# Altium PCB hades_flight_controller_pcb.PcbDoc (part 2 of 2)
Units mm, origin at the board's own origin, x right, y up, seen from the top; angles counter-clockwise.
Board outline 60 x 80 mm, 2 copper layers (Top Layer, Bottom Layer), stack 1.67 mm thick; 73 components, 57 nets, 348 pads, 115 vias.
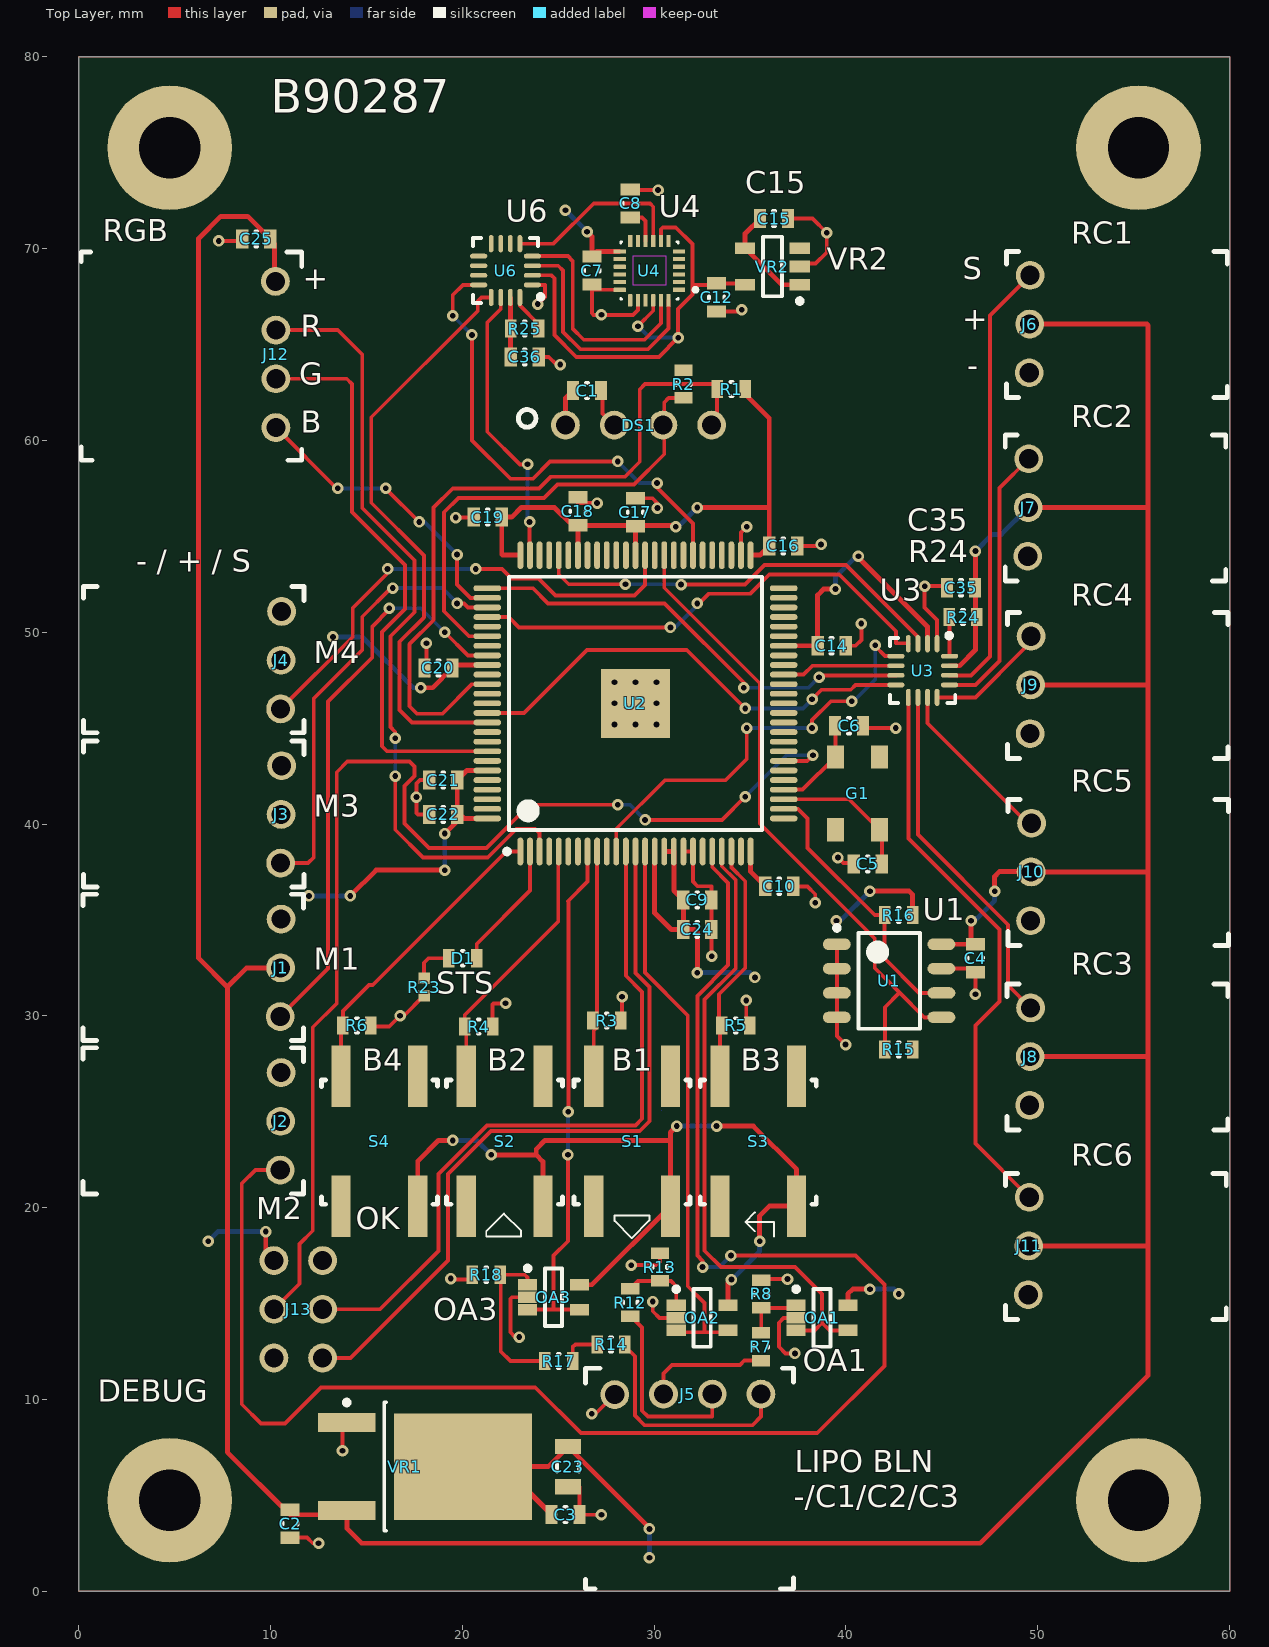
[diagram p0: Top Layer view]

## Part data (continued)
U4: "IMU ACCEL/GYRO/COMPI2C/SPI 24QFN", Case/Package=QFN, Manufacturer="TDK InvenSense", Max Operating Temperature=85°C, Min Operating Temperature=-40°C, Supplier Part Number 1=2911498, ComponentLink1Description=https://www.invensense.com/wp-content/uploads/2016/06/App-Note-eMD-20x48-User-Guide.pdf?src-supplier=Avnet, ComponentLink1URL=https://www.invensense.com/wp-content/uploads/2016/06/App-Note-eMD-20x48-User-Guide.pdf?src-supplier=Avnet, ComponentLink2Description=https://www.invensense.com/wp-content/uploads/2016/06/App-Note-eMD-20x48-User-Guide.pdf?src-supplier=Avnet+Europe, ComponentLink2URL=https://www.invensense.com/wp-content/uploads/2016/06/App-Note-eMD-20x48-User-Guide.pdf?src-supplier=Avnet+Europe, ComponentLink3Description=https://www.invensense.com/wp-content/uploads/2016/06/App-Note-eMD-20x48-User-Guide.pdf?src-supplier=Digi-Key, ComponentLink3URL=https://www.invensense.com/wp-content/uploads/2016/06/App-Note-eMD-20x48-User-Guide.pdf?src-supplier=Digi-Key, ComponentLink4Description=http://www.farnell.com/datasheets/2632662.pdf?src-supplier=Farnell, ComponentLink4URL=http://www.farnell.com/datasheets/2632662.pdf?src-supplier=Farnell, ComponentLink5Description=http://www.farnell.com/datasheets/2632662.pdf?src-supplier=Element14, ComponentLink5URL=http://www.farnell.com/datasheets/2632662.pdf?src-supplier=Element14, ComponentLink6Description=http://www.farnell.com/datasheets/2632662.pdf?src-supplier=Newark, ComponentLink6URL=http://www.farnell.com/datasheets/2632662.pdf?src-supplier=Newark, ComponentLink7Description=https://www.invensense.com/wp-content/uploads/2016/06/App-Note-eMD-20x48-User-Guide.pdf?src-supplier=Component+Distributors+Inc., ComponentLink7URL=https://www.invensense.com/wp-content/uploads/2016/06/App-Note-eMD-20x48-User-Guide.pdf?src-supplier=Component+Distributors+Inc., Manufacturer Part Number=ICM-20948, Mount="Surface Mount", Output Type=SPI,I2C, Packaging="Tape and Reel", Pricing 1="1=6.72, 10=4.51, 25=4.42, 50=4.33 (EUR)", RoHS Compliant=Yes, Sensor Type=Accelerometer,Gyroscope,Magnetometer, Stock 1=0, Supplier 1=Farnell
VR1: "Single-Output LDO, 800mA, Fixed (3.3), Internal Current Limit, Thermal Overload Protection 3-TO-252 0 to 125", Case/Package=TO-252-3, Dropout Voltage=1.2V, Input Bias Current=5mA, Manufacturer="Texas Instruments", Max Input Voltage=15V, Max Operating Temperature=125°C, Max Output Current=800mA, Min Input Voltage=4.7V, Min Operating Temperature=-40°C, Nominal Output Voltage=3.3V, Package Quantity=1, Quiescent Current=10mA, Supplier Part Number 1=2463937RL, ComponentLink1Description=http://www.farnell.com/datasheets/1994335.pdf?src-supplier=Element14, ComponentLink1URL=http://www.farnell.com/datasheets/1994335.pdf?src-supplier=Element14, ComponentLink2Description=http://www.ti.com/lit/ds/symlink/tlv1117.pdf?src-supplier=Digi-Key, ComponentLink2URL=http://www.ti.com/lit/ds/symlink/tlv1117.pdf?src-supplier=Digi-Key, ComponentLink3Description=http://www.ti.com/general/docs/suppproductinfo.tsp?distId=10&amp;gotoUrl=http%3A%2F%2Fwww.ti.com%2Flit%2Fgpn%2Ftlv1117&src-supplier=Digi-Key, ComponentLink3URL=http://www.ti.com/general/docs/suppproductinfo.tsp?distId=10&amp;gotoUrl=http%3A%2F%2Fwww.ti.com%2Flit%2Fgpn%2Ftlv1117&src-supplier=Digi-Key, ComponentLink4Description=http://focus.ti.com/lit/ds/symlink/tlv1117-15.pdf?src-supplier=Avnet+Europe, ComponentLink4URL=http://focus.ti.com/lit/ds/symlink/tlv1117-15.pdf?src-supplier=Avnet+Europe, Lead Free="Lead Free", Manufacturer Part Number=TLV1117-33CKVURG3, Min Current Limit=800mA, Mount="Surface Mount", Number of Outputs=1, Number of Pins=3, Number of Regulators=1, Output Current=800mA, Output Type=Fixed, Output Voltage=3.3V, Packaging="Tape and Reel", Polarity=Positive, Radiation Hardening=No, REACH SVHC="No SVHC", RoHS Compliant=Yes, Series=-, Stock 1=0, Supplier 1=Farnell
VR2: "MCP1804T-1802I/OT; LDOVoltage Regulator; 150mA; 1.8V +/-2%; 2 to 28Vin; 5-Pin SOT-23", Case/Package=SOT-23, Dropout Voltage=2.2V, Manufacturer=Microchip, Max Input Voltage=28V, Max Operating Temperature=85°C, Max Output Current=150mA, Max Power Dissipation=250mW, Min Input Voltage=2V, Min Operating Temperature=-40°C, Min Output Voltage=1.8V, Quiescent Current=105uA, Supplier Part Number 1=1825003, Accuracy=2%, ComponentLink1Description=http://www.microchip.com/mymicrochip/filehandler.aspx?ddocname=en544680&src-supplier=Future+Electronics, ComponentLink1URL=http://www.microchip.com/mymicrochip/filehandler.aspx?ddocname=en544680&src-supplier=Future+Electronics, ComponentLink2Description=http://www.microchip.com/mymicrochip/filehandler.aspx?ddocname=en533805&src-supplier=Digi-Key, ComponentLink2URL=http://www.microchip.com/mymicrochip/filehandler.aspx?ddocname=en533805&src-supplier=Digi-Key, Height=1.3mm, Lead Free="Lead Free", Length=3.1mm, Manufacturer Part Number=MCP1804T-1802I/OT, Mount="Surface Mount", Nominal Output Voltage=1.8V, Number of Outputs=1, Number of Pins=5, Output Current=150mA, Output Type=Fixed, Output Voltage=1.8V, Packaging="Tape and Reel", Polarity=Positive, Pricing 1="1=1.04, 25=0.795, 100=0.722 (EUR)", REACH SVHC="No SVHC", RoHS Compliant=Yes, Stock 1=595, Supplier 1=Farnell, Width=1.8mm

## Free pads (board coordinates)
  round 6.5 hole 3.2: 5(55.25,75.25) 6(4.75,75.25) 7(55.25,4.75) 8(4.75,4.75)

## Via types
v1: diameter 0.6/0.6 (per signal layer), hole 0.3, Top Layer to Bottom Layer, tented both sides, 107 vias
v2: diameter 0.6/0.6 (per signal layer), hole 0.3, Top Layer to Bottom Layer, 8 vias

## Nets (pads, with @x,y where several pads share a name; then routed paths per layer and width w, separated by ;. In a path a pad name is that pad's centre, name@x,y a point inside that pad or via, vN(x,y) a via of type N, cw(c..) or ccw(c..) an arc to the next point about the centre after c; other vN are vias at no path point)
"+1.8 V": C12.1 U4.8 U4.22 U6.2 VR2.5 | length 26.5
  Top Layer w0.2: U6.2 24.645,68.605 24.795,68.455 24.795,65.495 25.935,64.355 30.25,64.355 v1(31.25,65.355) 31.25,66.855 32,67.605 32,68.105 ; v1(29.15,65.955) 29.95,66.755 U4.22 ; U4.8 30.35,71.005 30.45,71.105 31.125,71.105 32,70.23 32,68.105 ; C12.1 34.67,68.185 VR2.5 ; C12.1@33.52,68.025 33.44,68.105 32,68.105
  Bottom Layer w0.2: v1(29.15,65.955) 29.75,65.355 v1(31.25,65.355)
"+3.3 V": C1.1 C3.1 C7.1 C9.1 C10.1 C14.1 C15.1 C16.1 C17.1 C18.1 C19.1 C20.1 C21.1 C22.1 C23.1 C24.1 C36.1 DS1.1 J13.4 OA1.5 OA2.5 OA3.5 R1.1 R2.1 R15.1 R16.1 R25.1 S1.1 S2.1 S3.1 S4.1 U2.15 U2.16 U2.17 U2.25 U2.44 U2.51 U2.63 U2.69 U2.75 U2.84 U2.95 U2.100 U3.2 U4.13 U6.15 VR1.2 VR2.1 VR2.4 | length 181.7
  Top Layer w0.254: v1(9.75,18.75) 9.75,17.662 J13.4 ; v1(14.16,36.25) 15.505,37.595 v1(19.08,37.595) ; S4.1 17.675,22.425 18.75,23.5 v1(19.5,23.5) ; v1(17.83,47.105) 18.445,47.105 C20.1 19.63,48.29 U2.84 ; v1(19.08,39.5) 19.73,40.15 C22.1 ; C21.1@19.73,42.52 C21.1 ; VR1.2 VR1.2@22.145,6.5 ; U2.100 20.085,40.29 19.875,40.5 C22.1 ; U2.95 20.23,42.79 C21.1 ; v1(21.5,22.75) 23.85,22.75 ; U6.15 22.5,64.375 C36.1 ; U2.75 22.095,54.015 22.055,54.055 C19.1 22.575,56 23.075,56.5 24.795,56.5 25.725,55.57 C18.1 ; S2.1 24.2,22.4 23.85,22.75 ; C3.1 VR1.2@22.145,6.5 ; DS1.1 25.375,62.205 C1.1 ; C23.1 C23.1@25.512,7.538 ; C23.1@25.525,7.55 C23.1@25.512,7.538 ; U2.69 C18.1 ; OA3.5 26.755,15.98 S1.1 30.85,23.5 ; v1(26.5,70.875) 26.75,70.625 C7.1 27.015,69.85 U4.13 ; U2.63 C17.1 ; v1(29.75,3.25) 29.75,3.3 C23.1@25.512,7.538 ; U2.15 30.025,35.361 30.886,34.5 C24.1 ; U2.16 U2.17 31.025,36.535 C9.1 C24.1 ; v1(31.125,55.5) 31.055,55.57 C18.1 ; v1(31.18,24.25) 30.85,23.92 30.85,23.5 ; v1(32.25,32.25) 32.25,34.335 32.085,34.5 C24.1 ; v1(32.25,56.5) 36,56.5 ; v1(33.25,24.25) 35.175,24.25 37.425,22 S3.1 36,20.075 35.5,19.575 v1(35.5,18.25) ; OA2.5 33.85,16.075 v1(34.025,16.25) ; R1.1 34.75,62.41 36,61.16 36,56.5 ; U2.25 35.025,37.515 C10.1 ; U2.51 35.515,54.015 C16.1 36,56.5 ; C15.1 34.74,70.785 VR2.4 36.64,68.115 VR2.1 ; U2.44 C14.1 38.52,51.935 38.835,52.25 v1(39.45,52.25) ; OA1.5 40.1,15.5 40.35,15.75 v1(41.25,15.75) ; v1(40.65,53.96) 40.65,53.89 44.25,50.29 U3.2 ; v1(41.25,36.5) 43.29,36.5 43.475,36.315 R16.1 ; C22.1 C21.1 ; VR1.2@22.145,6.5 24.475,6.5 C23.1@25.512,7.538 ; 23.85,22.75 23.85,23.05 24.3,23.5 30.85,23.5
  Bottom Layer w0.254: v1(6.75,18.25) 7.25,18.75 v1(9.75,18.75) ; v1(12,36.25) v1(14.16,36.25) ; v1(13.25,49.75) 14.79,49.75 17.435,47.105 v1(17.83,47.105) ; v1(19.08,37.595) v1(19.08,39.5) ; v1(19.5,23.5) 20.75,23.5 v1(21.5,22.75) ; v1(25.375,72) v1(26.5,70.875) ; v1(29.75,1.75) v1(29.75,3.25) ; v1(31.125,55.5) 31.25,55.5 v1(32.25,56.5) ; v1(31.18,24.25) v1(33.25,24.25) ; v1(32.25,32.25) 35,32.25 v1(35.25,32) ; v1(34.025,16.25) 34.04,16.25 35.5,17.71 v1(35.5,18.25) ; v1(39.45,52.25) 39.45,52.865 40.545,53.96 v1(40.65,53.96) ; v1(39.5,34.96) 39.71,34.96 v1(41.25,36.5) ; v1(41.25,15.75) 42.5,15.75 v1(42.75,15.5)
"+5 V": C2.1 C4.1 C25.1 C35.1 J1.2 J6.2 J7.2 J8.2 J9.2 J10.2 J11.2 J12.1 R24.1 U1.8 U3.15 VR1.3 | length 238.9
  Top Layer w0.254: J12.1 10.2,68.342 10.2,70.28 C25.1 8.805,71.675 7.4,71.675 6.25,70.525 6.25,33 7.75,31.5 ; J1.2 8.75,32.5 7.75,31.5 ; U1.8 C4.1 46.52,33.96 v1(46.52,34.96) ; U3.15 45.92,48.25 46.75,49.08 v1(46.75,54.229) ; v1(47.75,36.5) 47.75,37.265 48,37.515 49.635,37.515 J10.2 55.75,37.5 ; J7.2 55.75,56.5 ; J11.2 55.75,18 ; J6.2@49.525,65.54 J6.2@49.565,65.5 ; J6.2 55.685,66.065 55.75,66 55.75,56.5 ; J8.2 55.625,27.875 55.75,28 ; J9.2 55.725,47.25 55.75,47.225 ; 7.75,31.5 7.75,7.25 11.015,3.985 13.75,3.985 VR1.3 13.975,3.275 14.75,2.5 47,2.5 55.75,11.25 55.75,18 ; 55.75,18 55.75,28 ; 55.75,28 55.75,37.5 ; 55.75,37.5 55.75,47.225 ; 55.75,47.225 55.75,56.5
  Bottom Layer w0.254: v1(46.52,34.96) 46.71,34.96 47.75,36 v1(47.75,36.5) ; v1(46.75,54.229) 47.621,55.1 48.1,55.1 J7.2
GND: C1.2 C2.2 C3.2 C4.2 C5.1 C6.1 C7.2 C8.2 C9.2 C10.2 C12.2 C14.2 C15.2 C16.2 C17.2 C18.2 C19.2 C20.2 C21.2 C22.2 C23.2 C24.2 C25.2 C35.2 C36.2 DS1.2 J1.1 J2.1 J3.1 J4.1 J5.1 J6.1 J7.1 J8.1 J9.1 J10.1 J11.1 J13.1 OA1.2 OA2.2 OA3.2 pad.5 pad.6 pad.7 pad.8 R3.2 R4.2 R5.2 R6.2 R8.2 R13.2 R18.2 R23.2 U1.1 U1.2 U1.3 U1.4 U1.7 U2.18 U2.19 U2.52 U3.1 U4.18 U4.20 U6.1 VR1.1 VR2.2 | length 87.2
  Top Layer w0.2: v1(7.3,70.395) 8.415,70.395 C25.2 ; J4.1 J4.1@10.58,51.08 ; C2.2 11.905,2.795 12.2,2.5 v1(12.5,2.5) ; v1(13.75,7.325) 13.75,8.565 VR1.1 ; R6.2@15.095,29.25 15.285,29.44 16.19,29.44 v1(16.75,30) 16.95,30 R23.2 ; v1(18.125,49.425) 18.125,47.875 C20.2@18.25,47.75 ; C22.2 17.674,40.5 17.605,40.569 v1(17.605,41.405) 17.605,42.105 17.79,42.29 C21.2 ; v1(19.4,16.3) 19.35,16.25 20.525,16.25 R18.2 ; v1(19.655,55.978) C19.2@20.845,55.978 ; R4.2 21.575,30.595 21.63,30.65 v1(22.25,30.65) ; v1(22.96,13.25) 22.75,13.25 22.5,13.5 22.5,15.25 22.58,15.33 OA3.2 ; U6.1 24.3,68.105 24.3,67.48 v1(23.925,67.105) ; C36.2 24.5,64.355 24.905,63.95 v1(25.105,63.95) ; C23.2@25.525,5.45 26.105,5.45 C3.2 26.12,3.985 v1(27.25,3.985) ; C18.2@26.025,56.73 v1(27.025,56.73) ; v1(26.75,9.25) 26.943,9.25 J5.1 ; C7.2 C7.2@27.025,67.85 ; C1.2 27.3,62.67 27.3,61.41 DS1.2 ; U4.18 C7.2@27.025,67.85 ; R3.2@28.325,29.75 v1(28.325,31) ; C8.2 28.785,73.05 v1(30.2,73.05) ; v1(28.8,17) 30.11,17 30.3,17.19 R13.2 ; C17.2 29.905,56.98 30.171,56.714 v1(30.171,56.47) ; U4.20 29.15,66.795 28.9,66.545 v1(27.25,66.545) 26.835,66.545 26.75,66.63 26.75,67.85 C7.2@27.025,67.85 ; v1(29.925,15.1) 29.925,14.6 30.275,14.25 OA2.2 ; U2.18 U2.19 32.025,36.995 32.264,36.756 32.98,36.756 C9.2 C24.2 32.98,33.12 v1(33,33.1) ; C12.2 34.48,66.725 v1(34.57,66.815) ; U2.52@34.525,54.015 34.525,55.2 v1(34.825,55.5) ; v1(34.8,30.8) 34.8,29.975 34.825,29.95 R5.2@34.825,29.25 ; R8.2@35.58,16.175 35.68,16.275 v1(36.95,16.275) ; C15.2 38.26,71.565 v1(39,70.825) 39,69.804 38.417,69.221 37.746,69.221 VR2.2 ; C10.2 37.985,36.75 38.4,36.335 v1(38.4,35.9) ; v1(37.34,12.4) 36.85,12.4 36.5,12.75 36.5,14 36.75,14.25 OA1.2 ; C16.2 38.625,54.5 v1(38.7,54.575) ; U1.1 U1.2 U1.3 U1.4 39.525,28.955 v1(39.98,28.5) ; v1(39.58,38.25) 39.87,37.96 C5.1@40.4,37.96 ; C14.2 40.5,49.29 40.8,49.59 v1(40.8,50.45) ; C6.1@40.94,45 v1(42.6,45) ; U3.1 44.75,50.64 44.1,51.29 v1(44.1,52.4) 44.98,52.4 45.065,52.315 C35.2 ; U1.7 46.56,32.46 C4.2 v1(46.75,31.125)
  other v2: 27.925,45.19 29.025,45.19 30.125,45.19 27.925,46.29 30.125,46.29 27.925,47.39 29.025,47.39 30.125,47.39
NetC5_2: C5.2 G1.4 U2.28 | length 7.1
  Top Layer w0.2: U2.28 40.16,41.29 G1.4 ; C5.2@41.84,37.92 41.88,37.96 G1.4@41.88,39.37
NetC6_2: C6.2 G1.3 U2.29 | length 5
  Top Layer w0.2: U2.29 37.74,41.79 G1.3 39.45,44.84 C6.2@39.29,45
NetC8_1: C8.1 U4.10 | length 1.9
  Top Layer w0.2: C8.1 29.37,71.625 29.55,71.445 U4.10
NetD1_1: D1.1 U2.2 | length 6.7
  Top Layer w0.2: D1.1 20.75,33.75 23.525,36.525 U2.2
NetD1_2: D1.2 R23.1 | length 2.2
  Top Layer w0.2: R23.1 18,32.767 18.233,33 D1.2
NetDS1_3: DS1.3 R2.2 U2.81 | length 24.5
  Top Layer w0.2: U2.81 20.34,49.79 19.04,51.09 19.04,56.25 19.79,57 24.25,57 24.95,57.7 28.95,57.7 30.525,59.275 30.525,61.98 30.755,62.21 R2.2
NetDS1_4: DS1.4 R1.2 U2.86 | length 37.5
  Top Layer w0.2: U2.86 20.5,47.29 18.96,45.75 17.64,45.75 17.25,46.14 17.25,49.375 18.5,50.625 18.5,56.5 19.5,57.5 24,57.5 24.6,58.1 28.465,58.1 29.25,58.885 29.25,62.66 29.525,62.935 33.04,62.935 33.275,62.7 33.275,61.075 DS1.4
NetJ1_3: J1.3 U2.83 | length 29.8
  Top Layer w0.2: J1.3 13,32.46 13,46.39 15.305,48.695 15.305,50.305 16.182,51.182 v1(16.182,51.25) ; v1(19.08,50) 20.29,48.79 U2.83
  Bottom Layer w0.2: v1(16.182,51.25) 17.83,51.25 v1(19.08,50)
NetJ2_3: J2.3 U2.21 | length 88.3
  Top Layer w0.2: J2.3 9.21,21.96 8.5,21.25 8.5,9.75 9.5,8.75 10.75,8.75 12.625,10.625 23.8,10.625 26.175,8.25 38.5,8.25 42,11.75 42,16 40.5,17.5 v1(34,17.5) ; v1(32.525,16.9) 32.525,17.225 32.25,17.5 32.25,31.04 33.85,32.64 33.85,36.925 33.025,37.75 U2.21
  Bottom Layer w0.2: v1(32.525,16.9) 33.4,16.9 v1(34,17.5)
NetJ3_3: J3.3 U2.78 | length 23
  Top Layer w0.2: J3.3 11.96,37.96 12.25,38.25 12.25,46.54 14.78,49.07 14.78,50.805 16.275,52.3 v1(16.375,52.3) ; v1(19.725,51.5) 20.09,51.5 20.3,51.29 U2.78
  Bottom Layer w0.2: v1(16.375,52.3) 18.95,52.3 19.725,51.525 v1(19.725,51.5)
NetJ4_3: J4.3 U2.62 | length 25.7
  Top Layer w0.2: J4.3@10.75,46 J4.3 14.283,49.757 14.283,51.263 16.185,53.165 16.185,53.3 v1(16.1,53.3) ; v1(20.7,53.3) 22.065,53.3 22.565,52.8 23.975,52.8 24.86,51.915 28.98,51.915 29.525,52.46 U2.62
  Bottom Layer w0.2: v1(16.1,53.3) v1(20.7,53.3)
NetJ5_2: J5.2 R7.1 | length 6.4
  Top Layer w0.2: J5.2 30.485,11.348 30.937,11.8 34.47,11.8 34.695,12.025 R7.1
NetJ5_3: J5.3 R12.2 | length 10.2
  Top Layer w0.2: R12.2 28.79,14.325 29.365,13.75 29.365,9.41 29.67,9.105 33.025,9.105 J5.3
NetJ5_4: J5.4 R14.2 | length 12.1
  Top Layer w0.2: R14.2 28.475,12.775 29,12.25 29,9.155 29.505,8.65 35.11,8.65 35.565,9.105 J5.4
NetJ6_3: J6.3 U3.14 | length 23.3
  Top Layer w0.2: U3.14 46.52,47.75 47.5,48.73 47.5,66.505 J6.3
NetJ7_3: J7.3 U3.13 | length 14.3
  Top Layer w0.2: U3.13 46.75,47.25 48,48.5 48,57.515 J7.3
NetJ8_3: J8.3 U3.10 | length 18.6
  Top Layer w0.2: U3.10 43.75,39.45 48.45,34.75 48.45,31.59 J8.3
NetJ9_3: J9.3 U3.12 | length 6.6
  Top Layer w0.2: U3.12 46.745,46.6 49.29,49.145 49.29,49.79 J9.3
NetJ10_3: J10.3 U3.11 | length 8.9
  Top Layer w0.2: U3.11 44.25,45.25 49.46,40.04 J10.3
NetJ11_3: J11.3 U3.9 | length 29.7
  Top Layer w0.2: U3.9 43.25,39.25 48,34.5 48,30.75 46.75,29.5 46.75,23.34 J11.3
NetJ12_2: J12.2 U2.3 | length 41.4
  Top Layer w0.2: J12.2 13.5,65.75 14.78,64.47 14.78,56.47 17.5,53.75 17.5,51.04 16.25,49.79 16.25,45.05 16.5,44.8 v1(16.5,44.475) ; v1(16.5,42.5) 16.5,39.7 17.95,38.25 21.325,38.25 22.825,39.75 23.8,39.75 24.025,39.525 U2.3
  Bottom Layer w0.2: v1(16.5,42.5) v1(16.5,44.475)
NetJ12_3: J12.3 U2.93 | length 30.2
  Top Layer w0.2: J12.3 13.975,63.21 14.25,62.935 14.25,56.265 16.25,54.265 16.25,54.25 17,53.5 17,51.2 15.805,50.005 15.805,44.055 16.07,43.79 U2.93
NetJ12_4: J12.4 U2.77 | length 15.6
  Top Layer w0.2: J12.4 13.447,57.5 v1(13.5,57.5) ; v1(16,57.5) v1(17.75,55.75) ; v1(19.725,54.045) 19.725,52.482 20.417,51.79 U2.77
  Bottom Layer w0.2: v1(13.5,57.5) v1(16,57.5) ; v1(17.75,55.75) 18.02,55.75 v1(19.725,54.045)
NetJ13_2: J13.2 U2.12 | length 37.4
  Top Layer w0.2: J13.2 15.71,14.7 18.75,17.74 18.75,21.75 21.29,24.29 29.02,24.29 29.365,24.635 29.365,31.25 28.525,32.09 U2.12
NetJ13_3: J13.3 U2.13 | length 39.2
  Top Layer w0.2: J13.3 14.16,12.16 19.25,17.25 19.25,21.75 21.5,24 29.25,24 29.75,24.5 29.75,31.5 29.025,32.225 U2.13
NetJ13_5: J13.5 U2.32 | length 63.6
  Top Layer w0.2: J13.5@10.74,14.7 J13.5 11.5,16.028 11.5,18.095 12.2,18.795 12.2,29.4 13.447,30.647 13.447,42.697 14,43.25 17.25,43.25 17.5,43 17.5,42.5 16.983,41.983 16.983,40.025 18.258,38.75 21.25,38.75 23.5,41 v1(28.1,41) ; v1(29.525,40.21) 33.535,40.21 v1(34.75,41.425) ; U2.32 37.983,43.29 v1(38.275,43.582)
  Bottom Layer w0.2: v1(28.1,41) 28.735,41 v1(29.525,40.21) ; v1(34.75,41.425) 36.907,43.582 v1(38.275,43.582)
NetOA1_1: OA1.1 R7.2 R8.1 | length 3.2
  Top Layer w0.2: R7.2 35.58,13.49 R8.1 37.275,14.775 OA1.1
NetOA1_3: OA1.3 OA1.4 U2.22 | length 33.4
  Top Layer w0.2: U2.22 33.525,37.8 34.25,37.075 34.25,32.475 32.625,30.85 32.625,17.75 33.475,16.9 37.34,16.9 38.75,15.49 38.75,14 ; OA1.3 38.35,13.6 38.75,14 ; OA1.4 39.15,13.6 38.75,14
NetOA2_1: OA2.1 R12.1 R13.1 | length 3.7
  Top Layer w0.2: R12.1 29.15,16.175 R13.1 30.875,16.175 31.15,15.9 OA2.1
NetOA2_3: OA2.3 OA2.4 U2.14 | length 29.1
  Top Layer w0.2: U2.14 29.525,32.25 31.75,30.025 31.75,15.9 32.625,15.025 32.625,13.5 ; OA2.3 31.25,13.5 32.625,13.5 ; OA2.4 33.75,13.5 32.625,13.5
NetOA3_1: OA3.1 R17.1 R18.1 | length 8.2
  Top Layer w0.2: OA3.1 23.4,16.35 23.25,16.5 22.225,16.5 22,16.275 22,12.5 22.5,12 R17.1
NetOA3_3: OA3.3 OA3.4 U2.8 | length 27.1
  Top Layer w0.2: OA3.3 24.75,14.68 ; v1(25.5,22.75) 25.5,18.25 24.75,17.5 24.75,14.68 ; v1(25.525,25) 25.525,35.95 25.5,35.975 26.525,37 U2.8 ; OA3.4 24.75,14.68
  Bottom Layer w0.2: v1(25.5,22.75) v1@25.5,24.775
NetR3_1: R3.1 S1.4 U2.9 | length 11.8
  Top Layer w0.2: S1.4 26.85,29.225 26.875,29.25 27.025,29.4 U2.9
NetR4_1: R4.1 S2.4 U2.5 | length 13.8
  Top Layer w0.2: S2.4 20.2,29.175 20.125,29.25 20.125,30.05 25,34.925 25,38.54 U2.5
NetR5_1: R5.1 S3.4 U2.23 | length 12.6
  Top Layer w0.2: S3.4 33.425,29.2 33.375,29.25 33.375,31.125 34.75,32.5 34.75,37.015 34.025,37.74 U2.23
NetR6_1: R6.1 S4.4 U2.1 | length 16.1
  Top Layer w0.2: S4.4 13.675,29.4 R6.1 13.775,30.25 15.125,31.6 15.325,31.6 22.29,38.565 U2.1
NetR14_1: R14.1 R17.2 | length 2.1
  Top Layer w0.2: R17.2 25.75,12.725 25.895,12.87 R14.1
  Top Layer w0.254: R14.1@27.025,12.825 R14.1
NetR15_2: R15.2 U1.5 U2.60 | length 33.9
  Top Layer w0.2: U2.60 30.525,52.315 35.5,47.34 35.5,40.025 41.5,34.025 41.5,32.5 42.79,31.21 ; R15.2 42.025,30.445 42.79,31.21 ; U1.5 44.08,29.92 42.79,31.21
NetR16_2: R16.2 U1.6 U2.27 | length 14.5
  Top Layer w0.2: U2.27 37.5,40.79 38,40.29 38,38.75 41.5,35.25 R16.2 42,35.225 42,33 43.81,31.19 U1.6
NetR24_2: R24.2 U3.16 | length 2.1
  Top Layer w0.2: R24.2@45.275,50.805 45.4,50.68 U3.16
NetR25_2: R25.2 U6.16 | length 2
  Top Layer w0.2: U6.16 23,67.03 23.975,66.055 R25.2
NetU2_11: U2.11 U3.5 | length 22.2
  Top Layer w0.2: U2.11 28.025,39.75 30.559,42.284 33.716,42.284 34.825,43.392 v1(34.825,45) ; v1(38.23,45) 38.23,45.42 39.21,46.4 v1(40.3,46.4) ; v1(41.525,49.325) 41.525,49.265 42.04,48.75 U3.5
  Bottom Layer w0.2: v1(34.825,45) v1(38.23,45) ; v1(40.3,46.4) 40.4,46.4 41.525,47.525 v1(41.525,49.325)
NetU2_41: U2.41 U3.6 | length 6
  Top Layer w0.2: U2.41 37.79,47.79 38.25,48.25 U3.6
NetU2_57: U2.57 U6.12 | length 25.4
  Top Layer w0.2: v1(19.5,66.5) 19.5,67.58 20.025,68.105 U6.12 ; v1(20.5,65.5) 20.5,60 22.5,58 23.675,58 24.575,58.9 v1(28.1,58.9) ; v1(30.15,57.775) 30.15,57.55 32.025,55.675 U2.57
  Bottom Layer w0.2: v1(19.5,66.5) v1(20.5,65.5) ; v1(28.1,58.9) 29.225,57.775 v1(30.15,57.775)
NetU2_71: U2.71 U3.3 | length 22.3
  Top Layer w0.2: U2.71 25.025,53.02 25.545,52.5 v1(28.5,52.5) ; v1(31.4,52.482) 34.732,52.482 35.75,53.5 40,53.5 43.75,49.75 U3.3
  Bottom Layer w0.2: v1(28.5,52.5) 31.382,52.5 v1(31.4,52.482)
NetU2_74: U2.74 U6.14 | length 14.9
  Top Layer w0.2: U6.14 22,66.855 21.3,66.155 21.3,60.45 23,58.75 v1(23.4,58.75) ; v1(23.5,55.75) 23.5,54.04 U2.74
  Bottom Layer w0.2: v1(23.4,58.75) 23.4,55.85 v1(23.5,55.75)
NetU2_76: U2.76 U3.7 | length 23.9
  Top Layer w0.2: U2.76 23.674,52.29 24.464,51.5 30.54,51.5 34.75,47.29 34.67,47.21 v1(34.67,47.105) ; v1(38.595,47.655) 38.69,47.75 U3.7
  Bottom Layer w0.2: v1(34.67,47.105) 38.045,47.105 v1(38.595,47.655)
NetU2_79: U2.79 U3.4 | length 25.2
  Top Layer w0.2: U2.79 22.42,50.79 22.96,50.25 v1(30.85,50.25) ; v1(32.25,51.5) 32.335,51.5 32.835,52 35,52 36,53 39.65,53 42.6,50.05 42.6,49.425 43.225,49.425 U3.4
  Bottom Layer w0.2: v1(30.85,50.25) 31.085,50.25 32.25,51.415 v1(32.25,51.5)
NetU2_89: U2.89 U3.8 | length 24.4
  Top Layer w0.2: U2.89 23.21,45.79 26.5,49.08 31.695,49.08 v1(34.75,46.025) ; v1(38.23,46.5) 38.73,47 40.25,47 40.5,47.25 U3.8
  Bottom Layer w0.2: v1(34.75,46.025) 37.755,46.025 v1(38.23,46.5)
NetU2_90: U2.90 U6.13 | length 30.9
  Top Layer w0.2: U2.90 17.38,45.29 16.725,45.945 16.725,49.5 18,50.775 18,54 15.25,56.75 15.25,61.205 20.805,66.76 20.805,67.26 21,67.455 U6.13
NetU4_9: U4.9 U6.5 | length 9.7
  Top Layer w0.2: U6.5 24.75,70.255 26.85,72.355 29.775,72.355 29.95,72.18 U4.9
NetU4_23: U4.23 U6.4 | length 12.1
  Top Layer w0.2: U6.4 25.5,69.605 25.75,69.355 25.75,65.83 26.33,65.25 29.495,65.25 30.35,66.105 U4.23
NetU4_24: U4.24 U6.3 | length 12.7
  Top Layer w0.2: U6.3 25,69.105 25.25,68.855 25.25,65.655 26.155,64.75 29.67,64.75 30.75,65.83 U4.24
pads on no net: G1.1 G1.2 J2.2 J3.2 J4.2 J13.6 S1.2 S1.3 S2.2 S2.3 S3.2 S3.3 S4.2 S4.3 U2.4 U2.6 U2.7 U2.10 U2.20 U2.24 U2.26 U2.30 U2.31 U2.33 U2.34 U2.35 U2.36 U2.37 U2.38 U2.39 U2.40 U2.42 U2.43 U2.45 U2.46 U2.47 U2.48 U2.49 U2.50 U2.53 U2.54 U2.55 U2.56 U2.58 U2.59 U2.61 U2.64 U2.65 U2.66 U2.67 U2.68 U2.70 U2.72 U2.73 U2.80 U2.82 U2.85 U2.87 U2.88 U2.91 U2.92 U2.94 U2.96 U2.97 U2.98 U2.99 U4.1 U4.2 U4.3 U4.4 U4.5 U4.6 U4.7 U4.11 U4.12 U4.14 U4.15 U4.16 U4.17 U4.19 U4.21 U6.6 U6.7 U6.8 U6.9 U6.10 U6.11 VR2.3

## Polygon pours and split planes (outlines as drawn)
GND on Bottom Layer "Bottom Layer-GND" (solid, shelved, pour order 6): 0,80 59.75,80 60,79.75 60,0 0,0
"+3.3 V" on Top Layer "Top Layer-+3.3 V" (solid, shelved, pour order 16): 0,80 60,80 60,0 0,0

## Keep-outs
Top Layer:
  region: 30.367,25.044

## Other copper
Top Layer:
  pour cut-out: 19.194,56.75 19,56.556 19,45.153 16.967,45.153 17,45.12 17,43.574 16.182,43.574 16.182,37.677 34.488,37.677 35.035,37.13 35.155,37.25 38.275,37.25 38.275,49.913 38.299,49.89 41.21,49.89 41.21,51.72 39.267,53.663 35.316,53.663 35.316,54.794 35.772,55.25 35.75,55.272 35.75,56.247 32.534,56.247 32.516,56.265 32.229,55.978 31.562,55.978 30.21,57.33 30.131,57.25 19.25,57.25 19.25,56.787 19.08,56.617
  pour cut-out: 10.75,55.5

## Silkscreen, mask and mechanical layers (free items; w line width, h text height)
Top Overlay:
  lines w0.1: 35.25,18.77 34.77,19.25 34.75,19.25 ; 35.25,19.75 34.75,19.25 ; 36.25,18.5 36.25,19.25 34.75,19.25 ; 21.245,18.5 23.06,18.5 23.06,18.79 22.163,19.688 21.245,18.77 21.245,18.5 ; 27.94,19.31 27.94,19.6 29.755,19.6 29.755,19.33 28.837,18.413 27.94,19.31
  text "B90287" at 10,76.5 h3
  text "C15" at 34.75,72.5 h2
  text "U4" at 30.25,71.25 h2
  text "U6" at 22.25,71 h2
  text "RGB" at 1.25,70 h2
  text "RC1" at 51.75,69.85 h2
  text "VR2" at 39,68.5 h2
  text "S" at 46.075,68 h2
  text "+" at 11.67,67.5 h2
  text "+" at 46.05,65.375 h2
  text "R" at 11.58,65 h2
  text "-" at 46.325,62.955 h2
  text "G" at 11.5,62.5 h2
  text "RC2" at 51.75,60.285 h2
  text "B" at 11.58,60 h2
  text "C35" at 43.2,54.9 h2
  text "R24" at 43.25,53.25 h2
  text "- / + / S" at 3,52.75 h2
  text "U3" at 41.75,51.25 h2
  text "RC4" at 51.75,51 h2
  text "M4" at 12.25,48 h2
  text "RC5" at 51.75,41.29 h2
  text "M3" at 12.25,40 h2
  text "U1" at 44,34.58 h2
  text "M1" at 12.25,32 h2
  text "RC3" at 51.75,31.75 h2
  text "STS" at 18.625,30.75 h2
  text "B4" at 14.775,26.75 h2
  text "B2" at 21.3,26.75 h2
  text "B1" at 27.8,26.75 h2
  text "B3" at 34.525,26.75 h2
  text "RC6" at 51.75,21.785 h2
  text "M2" at 9.25,19 h2
  text "OK" at 14.45,18.475 h2
  text "OA3" at 18.475,13.75 h2
  text "OA1" at 37.75,11.077 h2
  text "DEBUG" at 1,9.5 h2
  text "LIPO BLN" at 37.34,5.8 h2
  text "-/C1/C2/C3" at 37.27,3.985 h2
Mechanical 1:
  the board outline again, w0.1
Mechanical 15:
  lines w0.1: 59,1 58.75,1 1,1 1,79 59,79 ; 59,1.05 59,79.05